# Altium PCB PCB1.PcbDoc (part 2 of 12)
Units mm, origin at the board's own origin, x right, y up, seen from the top; angles counter-clockwise.
Board outline 122.17 x 121.67 mm, 2 copper layers (Top Layer, Bottom Layer); 274 components, 225 nets, 941 pads, 421 vias.
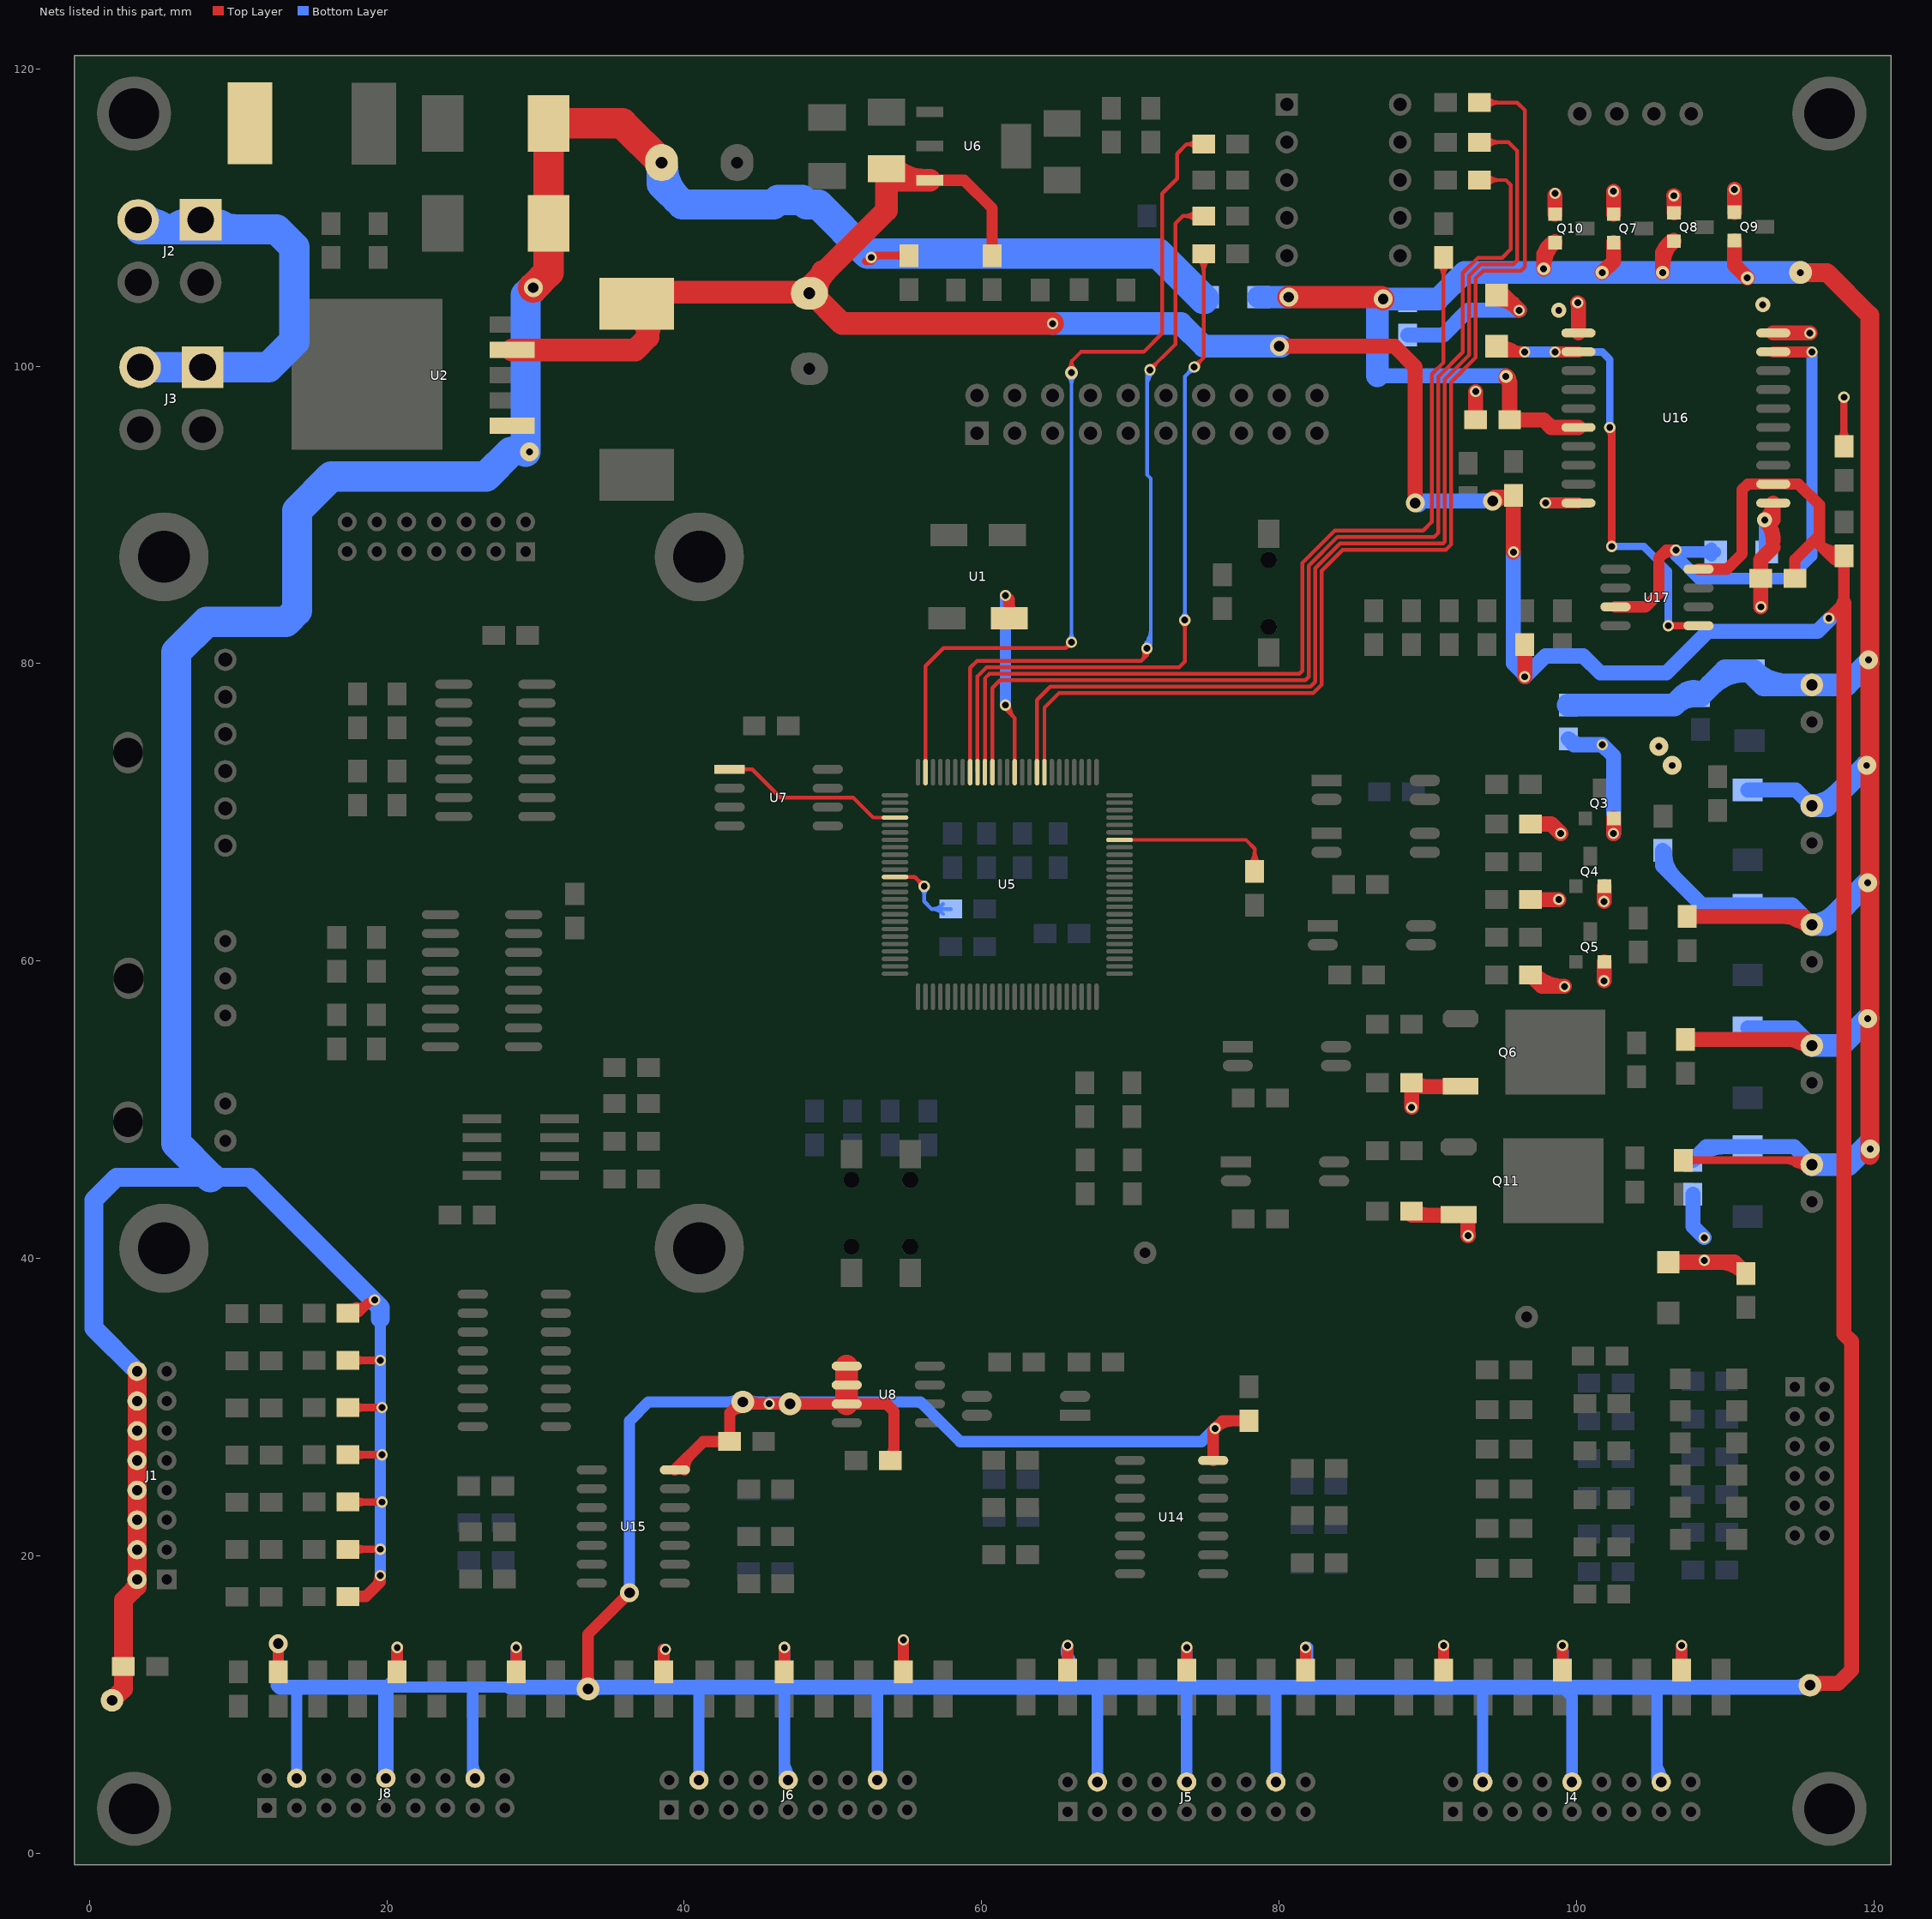
[diagram p2: the nets of this part, all layers, seen from the top]

## Via types
v1: diameter 0.762, hole 0.457, Top Layer to Bottom Layer, 339 vias
v2: diameter 1.27, hole 0.457, Top Layer to Bottom Layer, 39 vias
v3: diameter 0.889, hole 0.457, Top Layer to Bottom Layer, 21 vias
v4: diameter 1.27, hole 0.711, Top Layer to Bottom Layer, 12 vias
v5: diameter 1.524, hole 0.711, Top Layer to Bottom Layer, 5 vias
v6: diameter 1.016, hole 0.457, Top Layer to Bottom Layer, 3 vias
v7: diameter 0.711, hole 0.457, Top Layer to Bottom Layer, 1 vias
v8: diameter 1.524, hole 0.457, Top Layer to Bottom Layer, 1 vias

## Nets (pads, with @x,y where several pads share a name; then routed paths per layer and width w, separated by ;. In a path a pad name is that pad's centre, name@x,y a point inside that pad or via, vN(x,y) a via of type N, cw(c..) or ccw(c..) an arc to the next point about the centre after c; other vN are vias at no path point) (continued)
+5V: C16.1 C19.1 C62.1 C63.1 C65.1 J4.4 J4.10 J4.16 J5.4 J5.10 J5.16 J6.4 J6.10 J6.16 J8.4 J8.10 J8.16 L1.2 pad.0@115.697,11.303 R12.1 R14.1 R26.1 R28.1 R30.1 R32.1 R34.1 R36.1 R38.1 R40.1 R42.1 R44.1 R46.1 R48.1 R104.1 R105.1 R113.1 U2.4 U6.3 U8.1 U8.2 U8.3 U14.14 U15.14 U16.12 U17.8 | length 676.1
  Top Layer w0.762: R44.1@12.7,12.192 v4@12.7,14.351 ; R46.1@20.701,12.192 v1(20.701,13.843) ; R48.1@28.702,12.192 v1(28.702,13.843) ; v5(33.528,11.049) 33.528,14.732 v4@36.068,17.272 ; R26.1@38.608,12.192 v1@38.608,13.716 ; U15.14@39.37,25.781 41.275,27.686 C63.1@43.053,27.686 43.053,29.591 43.688,30.226 v1(45.72,30.226) U8.3@50.927,30.226 53.594,30.226 54.102,29.718 R12.1@54.102,26.543 ; R28.1@46.736,12.192 v1(46.736,13.843) ; R30.1@54.737,12.192 v1(54.737,14.351) ; U6.3@56.515,112.508 58.815,112.508 60.706,110.617 R14.1@60.706,107.442 ; R32.1@65.786,12.319 v1(65.786,13.97) ; R34.1@73.787,12.319 v1(73.787,13.843) ; U14.14@75.565,26.416 75.565,28.448 v1(75.692,28.575) ; C62.1@77.978,29.083 76.2,29.083 v1(75.692,28.575) ; R36.1@81.788,12.319 v1(81.788,13.843) ; R38.1@91.059,12.319 v1(91.059,13.97) ; R40.1@99.06,12.319 v1(99.06,13.97) ; R42.1@107.061,12.319 v1(107.061,13.97) ; U17.8@108.204,86.36 110.109,86.36 111.125,87.376 111.125,91.694 111.506,92.075 U16.12@113.23,92.075 114.935,92.075 116.332,90.678 116.332,88.646 ; C65.1@114.681,85.725 114.681,86.995 116.332,88.646 ; 116.769,87.578 cw(c116.822,86.128) R105.1@117.81,87.19 ; v1(116.967,83.058) 117.983,84.074 R105.1@117.983,87.249 117.094,87.249 116.332,88.011 ; v5@33.259,11.318 ccw(c32.608,11.969) 33.528,11.969 ; v5@33.259,11.318 ccw(c32.608,11.969) 33.528,11.969 ; v5@33.259,11.318 ccw(c32.608,11.969) 33.528,11.969 ; 33.528,11.969 ccw(c34.448,11.969) v5@33.797,11.318 ; 33.528,11.969 ccw(c34.448,11.969) v5@33.797,11.318 ; 33.528,11.969 ccw(c34.448,11.969) v5@33.797,11.318 ; U15.14@40.005,25.781 cw(c41.538,25.781) 40.454,26.865 ; U15.14@40.005,25.781 cw(c41.538,25.781) 40.454,26.865 ; U15.14@40.005,25.781 cw(c41.538,25.781) 40.454,26.865 ; U15.14@40.005,25.781 cw(c41.538,25.781) 40.454,26.865 ; 43.075,29.613 cw(c43.942,28.746) v5@43.942,29.972 ; 43.075,29.613 cw(c43.942,28.746) v5@43.942,29.972 ; 43.075,29.613 cw(c43.942,28.746) v5@43.942,29.972 ; v5@44.211,30.622 ccw(c45.168,31.579) 45.168,30.226 ; v5@44.211,30.622 ccw(c45.168,31.579) 45.168,30.226 ; v5@44.211,30.622 ccw(c45.168,31.579) 45.168,30.226 ; 46.197,30.226 cw(c46.197,29.306) v5@46.848,29.957 ; 46.197,30.226 ccw(c46.197,31.146) v5@46.848,30.495 ; 46.197,30.226 cw(c46.197,29.306) v5@46.848,29.957 ; 46.197,30.226 ccw(c46.197,31.146) v5@46.848,30.495 ; 46.197,30.226 cw(c46.197,29.306) v5@46.848,29.957 ; 46.197,30.226 ccw(c46.197,31.146) v5@46.848,30.495 ; v5@47.386,29.957 cw(c48.037,29.306) 48.037,30.226 ; v5@47.386,29.957 cw(c48.037,29.306) 48.037,30.226 ; v5@47.386,29.957 cw(c48.037,29.306) 48.037,30.226 ; v5@47.386,30.495 ccw(c48.037,31.146) 48.037,30.226 ; v5@47.386,30.495 ccw(c48.037,31.146) 48.037,30.226 ; v5@47.386,30.495 ccw(c48.037,31.146) 48.037,30.226 ; R12.1@53.795,26.596 ccw(c53.055,27.336) 54.102,27.336 ; R12.1@53.795,26.596 ccw(c53.055,27.336) 54.102,27.336 ; R12.1@53.795,26.596 ccw(c53.055,27.336) 54.102,27.336 ; v1(75.692,28.575) cw(c76.918,27.349) 76.918,29.083 ; v1(75.692,28.575) cw(c76.918,27.349) 76.918,29.083 ; v1(75.692,28.575) cw(c76.918,27.349) 76.918,29.083 ; 116.332,88.011 ccw(c117.446,89.125) 117.908,87.619 cw(c117.446,89.125) 116.332,88.011 ; 116.332,88.011 116.332,88.646 ; 117.228,87.115 ccw(c117.867,87.754) 118.132,86.89 cw(c117.867,87.754) 117.228,87.115
  Top Layer w1.016: v4(80.01,101.346) 87.757,101.346 89.154,99.949 v4(89.154,90.805) ; v4@94.488,91.186 95.631,91.186 R104.1@95.758,91.313 v1(95.758,87.503) ; v1(96.52,79.121) R113.1@96.52,81.28 ; pad.0@115.57,11.43 117.602,11.43 118.491,12.319 118.491,34.417 117.983,34.925 117.983,84.074 ; v4@94.451,90.842 cw(c95.281,90.012) 95.281,91.186 ccw(c95.281,90.012) v4@94.451,90.842 ; pad.0@115.877,11.123 cw(c116.617,10.383) 116.617,11.43 ccw(c116.617,10.383) pad.0@115.877,11.123
  Top Layer w1.27: L1.2@37.561,102.87 L1.2@37.561,104.206
  Top Layer w1.524: U2.4@28.433,101.1 36.711,101.1 37.561,101.95 ; L1.2@36.891,103.48 cw(c35.48,101.95) 37.561,101.95 ; L1.2@37.561,102.87 37.561,101.95 ; L1.2@37.561,104.206 38.333,104.978 C16.1@48.082,104.978 ; L1.2@38.231,103.48 ccw(c39.642,101.95) 37.561,101.95 ; C16.1@48.393,105.197 ccw(c47.427,106.869) 49.292,106.369 ; U8.3@50.927,30.226 U8.2@50.927,31.496 U8.1@50.927,32.766 ; C19.1@54.042,113.382 ccw(c56.15,115.49) U6.3@56.15,112.508 ; U6.3@56.515,112.508 54.37,112.508 C19.1@53.594,113.284 53.594,110.49 C16.1@48.082,104.978 ; v1(64.77,102.87) 50.622,102.87 48.514,104.978 C16.1@48.082,104.978 ; 37.561,101.95 cw(c39.668,101.95) 38.225,103.486 ccw(c39.668,101.95) 37.561,101.95 ; 37.561,101.95 ccw(c35.504,101.95) 36.885,103.474 cw(c35.504,101.95) 37.561,101.95 ; C16.1@48.752,104.978 cw(c50.37,104.978) 49.226,106.122 ccw(c50.37,104.978) C16.1@48.752,104.978 ; C16.1@48.9,104.904 cw(c51.051,104.904) 49.53,106.426 ccw(c51.051,104.904) C16.1@48.9,104.904
  Bottom Layer w0.762: 12.7,11.303 v4@12.7,14.351 ; J8.4@13.938,5.048 13.938,11.017 14.097,11.176 ; v1(20.701,13.843) 20.701,11.94 19.937,11.176 25.781,11.176 ; J8.16@25.938,5.048 25.781,5.205 25.781,11.176 ; v1(28.702,13.843) 28.702,11.557 28.321,11.176 25.781,11.176 ; 32.302,11.176 cw(c32.302,9.823) v5@33.259,10.78 ; v5@33.401,11.176 v5(33.528,11.049) ; v5@33.797,10.78 cw(c34.754,9.823) 34.754,11.176 ; v4(36.322,17.526) 36.322,29.083 37.592,30.353 45.339,30.353 ; 38.608,11.176 v1@38.608,13.716 ; 40.767,11.176 40.989,10.954 J6.4@40.989,4.921 ; v1@45.72,30.353 55.88,30.353 58.547,27.686 74.803,27.686 v1(75.692,28.575) ; v1@46.736,13.716 46.736,11.176 46.736,5.174 J6.10@46.989,4.921 ; 52.959,11.176 52.959,10.795 52.989,10.765 J6.16@52.989,4.921 ; 54.737,11.176 v1(54.737,14.351) ; 65.913,11.176 65.913,13.081 ; 67.437,11.176 67.786,10.827 J5.4@67.786,4.794 ; J5.10@73.786,4.794 73.786,10.923 73.533,11.176 73.914,11.557 73.787,11.684 v1(73.787,13.843) ; 79.756,11.176 79.786,11.146 J5.16@79.786,4.794 ; 81.915,11.176 v1@81.915,13.843 ; v1(91.059,13.97) 91.059,11.43 91.313,11.176 ; J4.4@93.694,4.794 93.694,11.144 99.092,11.144 ; v1@99.06,13.843 99.06,13.589 99.092,13.557 99.092,11.176 ; J4.10@99.694,4.794 99.694,10.542 99.092,11.144 ; J4.16@105.694,4.794 105.41,5.078 105.41,11.144 99.092,11.144 ; 106.966,11.176 107.061,11.271 v1(107.061,13.97) ; 25.781,6.076 ccw(c26.966,6.076) J8.16@26.128,5.238 ; 25.781,6.076 ccw(c26.966,6.076) J8.16@26.128,5.238 ; 25.781,6.076 ccw(c26.966,6.076) J8.16@26.128,5.238 ; 43.022,30.353 cw(c43.022,29.433) v5@43.673,30.084 ; 43.022,30.353 ccw(c43.022,31.273) v5@43.673,30.622 ; 43.022,30.353 cw(c43.022,29.433) v5@43.673,30.084 ; 43.022,30.353 ccw(c43.022,31.273) v5@43.673,30.622 ; 43.022,30.353 cw(c43.022,29.433) v5@43.673,30.084 ; 43.022,30.353 ccw(c43.022,31.273) v5@43.673,30.622 ; v5@44.211,30.084 cw(c44.862,29.433) 44.862,30.353 ; v5@44.211,30.084 cw(c44.862,29.433) 44.862,30.353 ; v5@44.211,30.084 cw(c44.862,29.433) 44.862,30.353 ; v5@44.211,30.622 ccw(c44.862,31.273) 44.862,30.353 ; v5@44.211,30.622 ccw(c44.862,31.273) 44.862,30.353 ; v5@44.211,30.622 ccw(c44.862,31.273) 44.862,30.353 ; v1(45.72,30.226) cw(c46.005,29.733) 46.152,30.283 ; v1(45.72,30.226) cw(c46.005,29.733) 46.152,30.283 ; v1(45.72,30.226) cw(c46.005,29.733) 46.152,30.283 ; v1@45.891,30.353 cw(c45.891,29) v5@46.848,29.957 ; v1@45.891,30.353 cw(c45.891,29) v5@46.848,29.957 ; v1@45.891,30.353 cw(c45.891,29) v5@46.848,29.957 ; 46.736,6.181 ccw(c48.249,6.181) J6.10@47.179,5.111 ; 46.736,6.181 ccw(c48.249,6.181) J6.10@47.179,5.111 ; 46.736,6.181 ccw(c48.249,6.181) J6.10@47.179,5.111 ; J6.10@46.795,5.108 ccw(c46.462,5.428) 46.863,5.66 ; J6.10@46.795,5.108 ccw(c46.462,5.428) 46.863,5.66 ; J6.10@46.795,5.108 ccw(c46.462,5.428) 46.863,5.66 ; v5@47.386,29.957 cw(c48.343,29) 48.343,30.353 ; v5@47.386,29.957 cw(c48.343,29) 48.343,30.353 ; v5@47.386,29.957 cw(c48.343,29) 48.343,30.353 ; v1(65.786,13.97) ccw(c66.442,13.61) 65.913,13.081 ; v1(65.786,13.97) ccw(c66.442,13.61) 65.913,13.081 ; v1(65.786,13.97) 65.786,13.208 65.913,13.081 ; 105.41,6.129 ccw(c107.029,6.129) J4.16@105.884,4.984 ; 105.41,6.129 ccw(c107.029,6.129) J4.16@105.884,4.984 ; 105.41,6.129 ccw(c107.029,6.129) J4.16@105.884,4.984 ; J4.16@105.487,4.966 ccw(c105.074,5.311) 105.54,5.58 ; J4.16@105.487,4.966 ccw(c105.074,5.311) 105.54,5.58 ; J4.16@105.487,4.966 ccw(c105.074,5.311) 105.54,5.58
  Bottom Layer w1.016: 12.7,11.303 12.827,11.176 14.097,11.176 19.937,11.176 19.938,11.175 J8.10@19.938,5.048 ; 28.321,11.176 v5@33.401,11.176 ; v5@33.528,11.176 40.767,11.176 46.736,11.176 52.959,11.176 54.737,11.176 65.913,11.176 67.437,11.176 73.533,11.176 79.756,11.176 81.915,11.176 91.313,11.176 99.092,11.176 106.966,11.176 115.316,11.176 pad.0@115.57,11.43 ; v4@89.408,90.678 89.662,90.932 v4(94.361,90.932) ; v1(95.758,87.503) 95.758,80.01 v1@96.52,79.248 ; v1(96.52,79.121) 97.917,80.518 100.457,80.518 101.6,79.375 106.045,79.375 108.839,82.169 116.205,82.169 v1@117.03,82.995 ; 32.608,11.176 cw(c32.608,10.129) 33.348,10.869 ccw(c32.608,10.129) 32.608,11.176 ; v5@33.708,10.869 cw(c34.448,10.129) 34.448,11.176 ccw(c34.448,10.129) v5@33.708,10.869 ; 114.777,11.176 ccw(c114.777,12.223) 115.517,11.483 cw(c114.777,12.223) 114.777,11.176
  Bottom Layer w1.524: v1(64.77,102.87) 73.406,102.87 74.93,101.346 v4@80.137,101.346
  other v1: 38.735,13.716
  other v4: 12.7,14.097
  other v5: 47.117,30.226 43.942,30.353
+24V: C4.1 C8.1 C17.1 D11.2 D13.2 J1.2 J1.4 J1.6 J1.8 J1.10 J1.12 J1.14 J1.16 pad.1@1.524,10.287 R16.1 R49.2 R50.2 R51.2 R52.2 R53.2 R54.2 R55.2 R115.2 U2.1 | length 280.2
  Top Layer w0.508: R50.2@17.399,20.447 v1(19.558,20.447) ; R51.2@17.399,23.622 v1(19.685,23.622) ; R52.2@17.399,26.797 v1(19.685,26.797) ; R53.2@17.399,29.972 v1(19.685,29.972) ; R54.2@17.399,33.147 v1(19.558,33.147) ; R55.2@17.416,36.385 cw(c18.239,35.911) R55.2@17.993,36.828 ; R55.2@17.52,36.195 ccw(c17.57,37.313) 18.361,36.522 ; R55.2@17.543,36.703 ccw(c17.638,38.877) v1@19.177,37.338 ; 18.161,36.322 v1@19.177,37.338 ; 18.627,37.02 cw(c18.968,36.43) v1@19.144,37.088 ; 18.743,36.904 cw(c19.177,36.471) v1@19.177,37.084 ; v1(19.177,37.211) v1@19.177,37.338 ; 52.197,107.061 52.578,107.061 52.959,107.442 ; R16.1@55.118,107.442 52.959,107.442 ; R50.2@17.795,20.178 cw(c18.446,19.527) 18.446,20.447 ; R50.2@17.795,20.178 cw(c18.446,19.527) 18.446,20.447 ; R50.2@17.795,20.178 cw(c18.446,19.527) 18.446,20.447 ; R50.2@17.795,20.716 ccw(c18.446,21.367) 18.446,20.447 ; R50.2@17.795,20.716 ccw(c18.446,21.367) 18.446,20.447 ; R50.2@17.795,20.716 ccw(c18.446,21.367) 18.446,20.447 ; R51.2@17.795,23.353 cw(c18.446,22.702) 18.446,23.622 ; R51.2@17.795,23.353 cw(c18.446,22.702) 18.446,23.622 ; R51.2@17.795,23.353 cw(c18.446,22.702) 18.446,23.622 ; R51.2@17.795,23.891 ccw(c18.446,24.542) 18.446,23.622 ; R51.2@17.795,23.891 ccw(c18.446,24.542) 18.446,23.622 ; R51.2@17.795,23.891 ccw(c18.446,24.542) 18.446,23.622 ; R52.2@17.795,26.528 cw(c18.446,25.877) 18.446,26.797 ; R52.2@17.795,26.528 cw(c18.446,25.877) 18.446,26.797 ; R52.2@17.795,26.528 cw(c18.446,25.877) 18.446,26.797 ; R52.2@17.795,27.066 ccw(c18.446,27.717) 18.446,26.797 ; R52.2@17.795,27.066 ccw(c18.446,27.717) 18.446,26.797 ; R52.2@17.795,27.066 ccw(c18.446,27.717) 18.446,26.797 ; R53.2@17.795,29.703 cw(c18.446,29.052) 18.446,29.972 ; R53.2@17.795,29.703 cw(c18.446,29.052) 18.446,29.972 ; R53.2@17.795,29.703 cw(c18.446,29.052) 18.446,29.972 ; R53.2@17.795,30.241 ccw(c18.446,30.892) 18.446,29.972 ; R53.2@17.795,30.241 ccw(c18.446,30.892) 18.446,29.972 ; R53.2@17.795,30.241 ccw(c18.446,30.892) 18.446,29.972 ; R54.2@17.795,32.878 cw(c18.446,32.227) 18.446,33.147 ; R54.2@17.795,32.878 cw(c18.446,32.227) 18.446,33.147 ; R54.2@17.795,32.878 cw(c18.446,32.227) 18.446,33.147 ; R54.2@17.795,33.416 ccw(c18.446,34.067) 18.446,33.147 ; R54.2@17.795,33.416 ccw(c18.446,34.067) 18.446,33.147 ; R54.2@17.795,33.416 ccw(c18.446,34.067) 18.446,33.147 ; 52.959,107.442 ccw(c52.959,107.156) 52.695,107.266 cw(c52.959,107.156) 52.959,107.442 ; 54.198,107.442 cw(c54.198,106.522) 54.849,107.173 ccw(c54.198,106.522) 54.198,107.442 ; 54.198,107.442 ccw(c54.198,108.362) 54.849,107.711 cw(c54.198,108.362) 54.198,107.442 ; v1@52.668,107.225 cw(c53.191,106.702) 53.191,107.442 ccw(c53.191,106.702) v1@52.668,107.225
  Top Layer w0.762: R49.2@17.78,17.272 18.593,17.272 19.558,18.237 v1(19.558,18.669) ; 19.253,17.932 ccw(c18.516,18.669) v1(19.558,18.669) ; 19.253,17.932 ccw(c18.516,18.669) v1(19.558,18.669) ; 19.253,17.932 ccw(c18.516,18.669) v1(19.558,18.669)
  Top Layer w1.27: pad.1@1.651,10.414 2.286,11.049 2.286,12.954 2.286,17.018 3.207,17.939 J1.2@3.207,18.415 J1.4@3.207,20.415 J1.6@3.207,22.415 J1.8@3.207,24.415 J1.10@3.207,26.415 J1.12@3.207,28.415 J1.14@3.207,30.415 J1.16@3.207,32.415 ; 2.845,17.577 ccw(c2.007,18.415) J1.2@3.192,18.415 ; 2.845,17.577 ccw(c2.007,18.415) J1.2@3.192,18.415 ; 2.845,17.577 ccw(c2.007,18.415) J1.2@3.192,18.415
  Top Layer w2.032: v4(29.845,105.283) 30.873,106.311 D13.2@30.873,109.605 D11.2@30.873,116.336 35.833,116.336 C17.1@38.479,113.69
  Bottom Layer w0.762: v1(19.558,18.669) v1(19.558,20.447) v1(19.558,33.147) 19.558,35.941
  Bottom Layer w1.27: J1.16@3.207,32.415 0.305,35.317 0.305,43.942 1.829,45.466 8.128,45.466 10.795,45.466 19.558,36.703 19.558,35.941
  Bottom Layer w2.032: 8.128,45.466 5.842,47.752 5.842,80.772 7.874,82.804 13.208,82.804 13.97,83.566 13.97,90.297 16.256,92.583 26.67,92.583 28.321,94.234 ; v2@29.337,94.234 29.337,104.775 v4(29.845,105.283) ; C17.1@38.481,113.69 38.481,112.268 39.878,110.871 46.002,110.871 46.307,111.176 47.927,111.176 48.232,110.871 49.022,110.871 52.324,107.569 71.882,107.569 R115.2@74.93,104.521 ; C17.1@38.563,113.54 ccw(c41.829,113.54) 39.519,111.23 ; C17.1@38.563,113.54 ccw(c41.829,113.54) 39.519,111.23 ; C17.1@38.563,113.54 ccw(c41.829,113.54) 39.519,111.23
  other v1: 52.578,107.315
  other v2: 29.591,94.234
+24VA: C10.1 C13.1 C15.1 C67.1 D39.K D40.K D41.K D42.K D43.K J14.1 J15.1 J16.1 J17.1 J19.1 Q7.2 Q8.2 Q9.2 Q10.2 R85.1 R86.1 R102.1 R103.1 R114.1 R115.1 U16.6 | length 342.1
  Top Layer w0.508: R114.1@107.188,46.609 115.53,46.609 J19.1@115.824,46.315 ; R114.1@107.457,46.34 cw(c108.108,45.689) 108.108,46.609 ; R114.1@107.457,46.34 cw(c108.108,45.689) 108.108,46.609 ; R114.1@107.457,46.34 cw(c108.108,45.689) 108.108,46.609 ; R114.1@107.457,46.34 cw(c108.108,45.689) 108.108,46.609 ; R114.1@107.457,46.878 ccw(c108.108,47.529) 108.108,46.609 ; R114.1@107.457,46.878 ccw(c108.108,47.529) 108.108,46.609 ; R114.1@107.457,46.878 ccw(c108.108,47.529) 108.108,46.609 ; R114.1@107.457,46.878 ccw(c108.108,47.529) 108.108,46.609 ; 113.888,46.609 cw(c113.888,44.379) J19.1@115.465,45.956 ; 113.888,46.609 cw(c113.888,44.379) J19.1@115.465,45.956 ; 113.888,46.609 cw(c113.888,44.379) J19.1@115.465,45.956 ; 113.888,46.609 cw(c113.888,44.379) J19.1@115.465,45.956 ; 114.71,46.391 ccw(c114.958,46.82) J19.1@115.385,46.571 ; 114.71,46.391 ccw(c114.958,46.82) J19.1@115.385,46.571 ; 114.71,46.391 ccw(c114.958,46.82) J19.1@115.385,46.571 ; 114.71,46.391 ccw(c114.958,46.82) J19.1@115.385,46.571 ; 114.71,46.391 ccw(c114.958,46.82) J19.1@115.385,46.571 ; 114.71,46.391 ccw(c114.958,46.82) J19.1@115.385,46.571 ; 115.114,46.609 cw(c115.114,45.605) J19.1@115.824,46.315 ; 115.114,46.609 cw(c115.114,45.605) J19.1@115.824,46.315 ; 115.114,46.609 cw(c115.114,45.605) J19.1@115.824,46.315 ; 115.114,46.609 cw(c115.114,45.605) J19.1@115.824,46.315
  Top Layer w1.016: v3(95.25,99.314) 95.25,99.187 95.504,98.933 C67.1@95.504,96.393 97.79,96.393 98.298,95.885 U16.6@100.13,95.885 ; v3(97.79,106.553) 97.79,107.553 Q10.2@98.556,108.319 ; v3(101.727,106.299) 102.493,107.065 Q7.2@102.493,108.319 ; v3(105.791,106.299) 105.791,107.645 Q8.2@106.553,108.407 ; R103.1@107.315,54.737 115.403,54.737 J17.1@115.824,54.316 ; R102.1@107.442,62.992 115.276,62.992 J16.1@115.824,62.444 ; Q9.2@110.621,108.446 110.621,106.803 v3(111.487,105.937) ; 114.657,62.834 ccw(c115.383,64.091) J16.1@115.758,62.689 ; 114.848,54.596 ccw(c115.332,55.435) J17.1@115.722,54.549 ; v3@95.295,99.359 cw(c94.79,98.854) 95.504,98.854 ; v3@95.295,99.359 cw(c94.795,98.856) 95.504,98.856 ; v3@95.295,99.359 cw(c94.79,98.854) 95.504,98.854 ; v3@95.295,99.359 cw(c94.795,98.856) 95.504,98.856 ; v3@95.295,99.359 cw(c94.79,98.854) 95.504,98.854 ; v3@95.295,99.359 cw(c94.795,98.856) 95.504,98.856 ; v3@95.295,99.359 cw(c94.79,98.854) 95.504,98.854 ; v3@95.295,99.359 cw(c94.795,98.856) 95.504,98.856 ; v3@97.79,106.593 cw(c100.281,106.593) Q10.2@98.52,108.355 ; v3@97.79,106.593 cw(c100.281,106.593) Q10.2@98.52,108.355 ; v3@97.79,106.593 cw(c100.281,106.593) Q10.2@98.52,108.355 ; v3@97.79,106.593 cw(c100.281,106.593) Q10.2@98.52,108.355 ; 97.79,107.236 cw(c99.018,107.236) Q10.2@98.536,108.366 ; 97.79,107.236 cw(c99.018,107.236) Q10.2@98.536,108.366 ; 97.79,107.236 cw(c99.018,107.236) Q10.2@98.536,108.366 ; 97.79,107.236 cw(c99.018,107.236) Q10.2@98.536,108.366 ; v3@105.791,106.69 cw(c108.27,106.69) Q8.2@106.517,108.443 ; v3@105.791,106.69 cw(c108.27,106.69) Q8.2@106.517,108.443 ; v3@105.791,106.69 cw(c108.27,106.69) Q8.2@106.517,108.443 ; v3@105.791,106.69 cw(c108.27,106.69) Q8.2@106.517,108.443 ; 105.791,107.33 cw(c107.014,107.33) Q8.2@106.533,108.454 ; 105.791,107.33 cw(c107.014,107.33) Q8.2@106.533,108.454 ; 105.791,107.33 cw(c107.014,107.33) Q8.2@106.533,108.454 ; 105.791,107.33 cw(c107.014,107.33) Q8.2@106.533,108.454 ; 113.888,62.992 cw(c113.888,60.508) 115.644,62.264 ccw(c113.888,60.508) 113.888,62.992 ; 114.194,54.737 cw(c114.194,52.686) 115.644,54.136 ccw(c114.194,52.686) 114.194,54.737
  Top Layer w1.27: v8(115.062,106.299) 116.84,106.299 119.71,103.429 v2@119.71,46.939
  Top Layer w1.524: v4(80.645,104.648) 86.868,104.648 v4(86.995,104.521)
  Bottom Layer w1.016: 86.614,99.365 95.199,99.365 v3(95.25,99.314) ; R86.1@105.791,67.437 105.791,66.421 108.446,63.766 D41.K@111.51,63.766 114.502,63.766 J16.1@115.824,62.444 ; C13.1@107.823,46.609 108.724,47.51 D43.K@111.51,47.51 114.629,47.51 J19.1@115.824,46.315 ; D42.K@111.51,55.511 114.629,55.511 J17.1@115.824,54.316 ; D40.K@111.51,71.513 114.756,71.513 J15.1@115.824,70.445 ; R86.1@105.918,67.31 ccw(c108.371,67.31) 106.636,65.576 ; R86.1@105.918,67.31 ccw(c108.371,67.31) 106.636,65.576 ; R86.1@105.918,67.31 ccw(c108.371,67.31) 106.636,65.576 ; R86.1@105.918,67.31 ccw(c108.371,67.31) 106.636,65.576 ; C13.1@107.913,46.646 cw(c109.999,44.56) 109.999,47.51 ; C13.1@107.913,46.646 cw(c109.999,44.56) 109.999,47.51 ; C13.1@107.913,46.646 cw(c109.999,44.56) 109.999,47.51 ; C13.1@107.913,46.646 cw(c109.999,44.56) 109.999,47.51
  Bottom Layer w1.524: R115.1@78.613,104.648 v4(80.645,104.648) ; 86.614,99.365 86.614,104.14 v4(86.995,104.521) 90.678,104.521 92.456,106.299 v3(101.727,106.299) v3(105.791,106.299) v8(115.062,106.299) ; C15.1@99.441,77.216 106.553,77.216 ; J19.1@115.824,46.315 118.273,46.315 v2@119.583,47.625 ; J17.1@115.824,54.316 117.765,54.316 v2(119.583,56.134) ; v2(119.507,73.152) 116.8,70.445 J15.1@115.824,70.445 ; v2(119.583,65.278) 116.749,62.444 J16.1@115.824,62.444 ; v2@119.583,80.01 118.146,78.573 J14.1@115.824,78.573 112.578,78.573 D39.K@111.637,79.514 109.994,79.514 R85.1@108.331,77.851 107.188,77.851 ; 86.614,103.908 cw(c87.608,103.908) v4@86.905,104.611 ; 86.614,103.908 cw(c87.608,103.908) v4@86.905,104.611 ; 86.614,103.908 cw(c87.608,103.908) v4@86.905,104.611 ; 106.553,77.216 cw(c108.113,75.656) R85.1@108.344,77.85 ; 106.553,77.216 cw(c108.113,75.656) R85.1@108.344,77.85 ; 106.553,77.216 cw(c108.113,75.656) R85.1@108.344,77.85 ; 106.553,77.216 107.188,77.851 ; 107.188,77.851 cw(c107.858,77.181) R85.1@108.404,77.955 ; 107.188,77.851 cw(c107.858,77.181) R85.1@108.404,77.955 ; 107.188,77.851 cw(c107.858,77.181) R85.1@108.404,77.955 ; 109.012,78.532 cw(c111.383,76.162) D39.K@111.383,79.514 ; 109.012,78.532 cw(c111.383,76.162) D39.K@111.383,79.514 ; 109.012,78.532 cw(c111.383,76.162) D39.K@111.383,79.514 ; D39.K@111.891,79.514 ccw(c114.163,81.786) 114.163,78.573 ; D39.K@111.891,79.514 ccw(c114.163,81.786) 114.163,78.573 ; D39.K@111.891,79.514 ccw(c114.163,81.786) 114.163,78.573 ; J16.1@115.824,62.444 ccw(c115.824,64.678) 117.403,63.098 cw(c115.824,64.678) J16.1@115.824,62.444 ; J15.1@115.824,70.445 ccw(c115.824,72.801) 117.49,71.135 cw(c115.824,72.801) J15.1@115.824,70.445
  other v2: 119.761,47.371 119.634,80.264
+24VIN: F1.1 J2.1 J2.3 J3.1 J3.3 | length 47
  Bottom Layer w2.032: J3.3@3.411,99.938 J3.1@7.611,99.938 12.054,99.938 13.779,101.663 13.779,108.013 12.584,109.209 7.611,109.209 J2.3@3.411,109.209 ; J2.3@3.439,109.493 cw(c4.028,108.158) 4.758,109.422 ; 6.011,109.422 cw(c6.74,108.158) J2.1@7.329,109.493 ; J2.1@7.639,109.493 cw(c8.228,108.158) 8.958,109.422 ; J2.3@3.556,110.116 ccw(c5.744,112.304) 5.744,109.209 cw(c5.744,112.304) J2.3@3.556,110.116 ; 5.024,109.209 ccw(c5.024,112.304) 7.212,110.116 cw(c5.024,112.304) 5.024,109.209 ; J2.1@7.756,110.116 ccw(c9.944,112.304) 9.944,109.209 cw(c9.944,112.304) J2.1@7.756,110.116
A: R91.1 U5.8 | length 84.4
  Top Layer w0.254: U5.8@64.222,72.701 64.222,77.049 65.202,78.029 82.296,78.029 82.855,78.588 82.855,86.235 84.275,87.655 91.211,87.655 91.567,88.011 91.567,98.933 93.218,100.584 93.218,105.918 93.726,106.426 96.266,106.426 96.52,106.68 96.52,117.221 96.012,117.729 R91.1@93.472,117.729 ; R91.1@93.958,117.37 cw(c94.825,116.503) 94.825,117.729 ; R91.1@93.958,117.37 cw(c94.825,116.503) 94.825,117.729 ; R91.1@93.958,117.37 cw(c94.825,116.503) 94.825,117.729 ; R91.1@93.958,117.37 cw(c94.825,116.503) 94.825,117.729 ; R91.1@93.958,118.088 ccw(c94.825,118.955) 94.825,117.729 ; R91.1@93.958,118.088 ccw(c94.825,118.955) 94.825,117.729 ; R91.1@93.958,118.088 ccw(c94.825,118.955) 94.825,117.729 ; R91.1@93.958,118.088 ccw(c94.825,118.955) 94.825,117.729
AGND: C10.2 C13.2 C15.2 C64.2 C65.2 C67.2 C69.2 Q3.2 Q4.2 Q5.2 Q6.3 Q7.1 Q8.1 Q9.1 Q10.1 Q11.3 R79.2 R80.2 R95.2 R96.2 R106.1 R107.2 R108.2 R110.2 U16.1 U16.10 U16.11 U16.20 | length 125.8
  Top Layer w0.508: R110.2@88.646,43.18 R110.2@88.914,42.912 ; C64.2@117.983,94.615 v1(117.983,97.917) ; C64.2@117.714,95.011 ccw(c117.063,95.662) 117.983,95.662 ; C64.2@117.714,95.011 ccw(c117.063,95.662) 117.983,95.662 ; C64.2@117.714,95.011 ccw(c117.063,95.662) 117.983,95.662 ; C64.2@117.714,95.011 ccw(c117.063,95.662) 117.983,95.662 ; 117.983,95.662 ccw(c118.903,95.662) C64.2@118.252,95.011 ; 117.983,95.662 ccw(c118.903,95.662) C64.2@118.252,95.011 ; 117.983,95.662 ccw(c118.903,95.662) C64.2@118.252,95.011 ; 117.983,95.662 ccw(c118.903,95.662) C64.2@118.252,95.011
  Top Layer w0.762: v1(97.917,90.805) U16.10@100.13,90.805
  Top Layer w1.016: R110.2@88.914,42.912 92.683,42.912 92.683,41.683 92.71,41.656 v1(92.71,41.529) ; v1(88.914,50.165) 88.914,51.548 Q6.3@92.683,51.548 ; C67.2@93.218,96.393 v1(93.218,98.298) ; R107.2@94.615,104.775 95.123,104.775 v1(96.139,103.759) ; R95.2@96.901,59.055 97.663,58.293 v1(99.187,58.293) ; R80.2@96.901,64.135 v1(98.806,64.135) ; R79.2@96.901,69.215 98.298,69.215 v1(98.933,68.58) ; v1@98.552,111.506 98.556,111.502 Q10.1@98.556,110.224 ; v1(100.076,104.267) 100.13,104.213 U16.1@100.13,102.235 ; v1(101.854,58.674) 101.866,58.686 Q5.2@101.866,59.948 ; v1(101.854,64.008) 101.866,64.02 Q4.2@101.866,65.028 ; v1(102.489,68.58) 102.501,68.592 Q3.2@102.501,69.6 ; v1(102.489,111.76) 102.493,111.756 Q7.1@102.493,110.224 ; R106.1@106.172,39.751 110.617,39.751 C69.2@111.379,38.989 ; v1(106.549,111.467) 106.553,111.464 Q8.1@106.553,110.312 ; v1(110.617,111.887) 110.621,111.883 Q9.1@110.621,110.351 ; v1(112.395,83.82) C65.2@112.395,85.725 112.395,86.995 113.23,87.83 ; 113.23,88.259 ccw(c111.246,88.259) v6(112.649,89.662) ; 113.23,89.662 U16.11@113.23,90.805 ; U16.20@113.23,102.235 v1(115.697,102.235) ; R110.2@89.117,43.27 ccw(c89.981,44.134) 89.981,42.912 ; R110.2@89.117,43.27 ccw(c89.981,44.134) 89.981,42.912 ; R110.2@89.117,43.27 ccw(c89.981,44.134) 89.981,42.912 ; R110.2@89.117,43.27 ccw(c89.981,44.134) 89.981,42.912 ; R96.2@89.117,51.906 ccw(c89.981,52.77) 89.981,51.548 ; R96.2@89.117,51.906 ccw(c89.981,52.77) 89.981,51.548 ; R96.2@89.117,51.906 ccw(c89.981,52.77) 89.981,51.548 ; R96.2@89.117,51.906 ccw(c89.981,52.77) 89.981,51.548 ; R107.2@94.615,104.521 cw(c94.615,102.681) v1@95.916,103.982 ; R107.2@94.615,104.521 cw(c94.615,102.681) v1@95.916,103.982 ; R107.2@94.615,104.521 cw(c94.615,102.681) v1@95.916,103.982 ; R107.2@94.615,104.521 cw(c94.615,102.681) v1@95.916,103.982 ; R107.2@94.835,104.902 ccw(c96.091,105.627) 95.716,104.226 ; R107.2@94.835,104.902 ccw(c96.091,105.627) 95.716,104.226 ; R107.2@94.835,104.902 ccw(c96.091,105.627) 95.716,104.226 ; R107.2@94.835,104.902 ccw(c96.091,105.627) 95.716,104.226 ; R107.2@94.835,104.902 ccw(c96.091,105.627) 95.716,104.226 ; R107.2@94.835,104.902 ccw(c96.091,105.627) 95.716,104.226 ; R95.2@97.118,59.145 ccw(c99.174,61.201) v1@99.174,58.293 ; R95.2@97.118,59.145 ccw(c99.174,61.201) v1@99.174,58.293 ; R95.2@97.118,59.145 ccw(c99.174,61.201) v1@99.174,58.293 ; R95.2@97.118,59.145 ccw(c99.174,61.201) v1@99.174,58.293 ; 109.539,39.751 cw(c109.539,37.276) C69.2@111.289,39.026 ; 109.539,39.751 cw(c109.539,37.276) C69.2@111.289,39.026 ; 109.539,39.751 cw(c109.539,37.276) C69.2@111.289,39.026 ; 109.539,39.751 cw(c109.539,37.276) C69.2@111.289,39.026 ; v6(112.649,89.662) ccw(c111.815,90.805) U16.11@113.23,90.805 ; v6(112.649,89.662) ccw(c111.815,90.805) U16.11@113.23,90.805 ; v6(112.649,89.662) ccw(c111.815,90.805) U16.11@113.23,90.805
  Bottom Layer w1.016: C10.2@88.646,102.108 91.059,102.108 92.71,103.759 v1(96.139,103.759) ; C15.2@99.441,74.93 99.822,74.549 v1(101.727,74.549) 102.489,73.787 v1(102.489,68.58) ; C13.2@107.823,44.323 107.823,42.164 v1(108.585,41.402) ; v6(112.649,89.662) 112.776,89.535 R108.2@112.776,87.503 ; C15.2@99.531,74.893 ccw(c100.361,75.723) 100.361,74.549 ; C15.2@99.531,74.893 ccw(c100.361,75.723) 100.361,74.549 ; C15.2@99.531,74.893 ccw(c100.361,75.723) 100.361,74.549 ; C15.2@99.531,74.893 ccw(c100.361,75.723) 100.361,74.549
  other v1: 108.585,39.878 98.552,111.633
  other v2: 106.426,73.152 105.537,74.422
  other v6: 98.806,103.759 112.522,104.14
B: R90.1 U5.9 | length 81.2
  Top Layer w0.254: U5.9@63.722,72.701 63.722,77.565 64.618,78.461 82.117,78.461 82.423,78.766 82.423,86.414 84.096,88.087 91.033,88.087 91.135,88.19 91.135,99.112 92.786,100.763 92.786,106.097 93.547,106.858 95.759,106.858 96.012,107.111 96.012,114.478 95.428,115.062 R90.1@93.472,115.062 ; R90.1@93.958,114.703 cw(c94.825,113.836) 94.825,115.062 ; R90.1@93.958,114.703 cw(c94.825,113.836) 94.825,115.062 ; R90.1@93.958,114.703 cw(c94.825,113.836) 94.825,115.062 ; R90.1@93.958,114.703 cw(c94.825,113.836) 94.825,115.062 ; R90.1@93.958,115.421 ccw(c94.825,116.288) 94.825,115.062 ; R90.1@93.958,115.421 ccw(c94.825,116.288) 94.825,115.062 ; R90.1@93.958,115.421 ccw(c94.825,116.288) 94.825,115.062 ; R90.1@93.958,115.421 ccw(c94.825,116.288) 94.825,115.062
BOOT0: R64.2 U5.94 | length 16.4
  Top Layer w0.254: U5.94@69.272,68.151 77.772,68.151 78.359,67.564 R64.2@78.359,66.294 ; R64.2@78,66.526 ccw(c77.133,67.393) 78.359,67.393 ; R64.2@78,66.526 ccw(c77.133,67.393) 78.359,67.393 ; R64.2@78,66.526 ccw(c77.133,67.393) 78.359,67.393 ; 78.359,67.393 ccw(c79.585,67.393) R64.2@78.718,66.526 ; 78.359,67.393 ccw(c79.585,67.393) R64.2@78.718,66.526 ; 78.359,67.393 ccw(c79.585,67.393) R64.2@78.718,66.526
BOOT1: R24.2 U5.37 | length 19.1
  Top Layer w0.254: U5.37@54.172,65.651 55.507,65.651 v1(56.134,65.024) ; 55.7,65.458 cw(c55.267,65.024) v1@55.88,65.024 ; 55.7,65.458 ccw(c56.134,65.891) v1@56.134,65.278 ; 55.7,65.458 cw(c55.267,65.024) v1@55.88,65.024 ; 55.7,65.458 ccw(c56.134,65.891) v1@56.134,65.278 ; 55.7,65.458 cw(c55.267,65.024) v1@55.88,65.024 ; 55.7,65.458 ccw(c56.134,65.891) v1@56.134,65.278 ; 55.794,65.344 ccw(c56.223,65.459) v1(56.134,65.024) ; 55.794,65.344 ccw(c56.223,65.459) v1(56.134,65.024) ; 55.794,65.344 ccw(c56.223,65.459) v1(56.134,65.024) ; 55.814,65.364 cw(c55.699,64.935) v1(56.134,65.024) ; 55.814,65.364 cw(c55.699,64.935) v1(56.134,65.024) ; 55.814,65.364 cw(c55.699,64.935) v1(56.134,65.024)
  Bottom Layer w0.254: v1(56.134,65.024) 56.134,64.008 56.642,63.5 ; R24.2@57.912,63.5 56.642,63.5 ; v1@55.954,64.844 cw(c55.521,64.411) 56.134,64.411 ; v1@55.954,64.844 cw(c55.521,64.411) 56.134,64.411 ; v1@55.954,64.844 cw(c55.521,64.411) 56.134,64.411 ; 56.134,64.411 cw(c56.747,64.411) v1@56.314,64.844 ; 56.134,64.411 cw(c56.747,64.411) v1@56.314,64.844 ; 56.134,64.411 cw(c56.747,64.411) v1@56.314,64.844 ; 56.642,63.5 cw(c56.642,62.468) R24.2@57.408,63.16 ; 56.642,63.5 ccw(c56.642,64.532) R24.2@57.408,63.84 ; 56.642,63.5 cw(c56.642,62.468) R24.2@57.408,63.16 ; 56.642,63.5 ccw(c56.642,64.532) R24.2@57.408,63.84 ; 56.642,63.5 cw(c56.642,62.468) R24.2@57.408,63.16 ; 56.642,63.5 ccw(c56.642,64.532) R24.2@57.408,63.84
C: R89.1 U5.15 | length 80.7
  Top Layer w0.254: U5.15@60.722,72.701 60.722,78.375 61.239,78.892 81.763,78.892 81.991,79.121 81.991,86.593 83.917,88.519 90.424,88.519 90.703,88.798 90.703,99.291 92.354,100.942 92.354,106.276 93.368,107.29 94.996,107.29 95.58,107.874 95.58,112.192 95.25,112.522 R89.1@93.472,112.522 ; R89.1@93.958,112.163 cw(c94.825,111.296) 94.825,112.522 ; R89.1@93.958,112.163 cw(c94.825,111.296) 94.825,112.522 ; R89.1@93.958,112.163 cw(c94.825,111.296) 94.825,112.522 ; R89.1@93.958,112.163 cw(c94.825,111.296) 94.825,112.522 ; R89.1@93.958,112.881 ccw(c94.825,113.748) 94.825,112.522 ; R89.1@93.958,112.881 ccw(c94.825,113.748) 94.825,112.522 ; R89.1@93.958,112.881 ccw(c94.825,113.748) 94.825,112.522 ; R89.1@93.958,112.881 ccw(c94.825,113.748) 94.825,112.522
CHECK1: R108.1 U16.19 U17.3 | length 46
  Top Layer w0.762: U17.3@102.616,83.82 104.648,83.82 105.537,84.709 105.537,87.122 106.045,87.63 v1(106.68,87.63) ; U16.19@113.23,100.965 v1(115.824,100.965) ; v1(106.68,87.63) ccw(c106.68,86.097) 105.596,87.181 cw(c106.68,86.097) v1(106.68,87.63)
  Bottom Layer w0.762: R108.1@109.347,87.503 106.807,87.503 106.807,87.122 ; v1(115.824,100.965) 115.824,87.249 114.3,85.725 108.204,85.725 106.807,87.122 ; v1(106.68,87.63) ccw(c107.167,87.482) 106.807,87.122 ; v1(106.68,87.63) ccw(c107.6,87.63) 106.949,86.98 cw(c107.6,87.63) v1(106.68,87.63) ; v1(106.68,87.63) ccw(c107.167,87.482) 106.807,87.122 ; v1(106.68,87.63) ccw(c107.167,87.482) 106.807,87.122 ; v1(106.68,87.63) ccw(c107.167,87.482) 106.807,87.122 ; v1(106.68,87.63) 106.68,87.249 106.807,87.122 ; 108.427,87.503 cw(c108.427,86.583) 109.078,87.234 ccw(c108.427,86.583) 108.427,87.503 ; 108.427,87.503 ccw(c108.427,88.423) 109.078,87.772 cw(c108.427,88.423) 108.427,87.503
CHECK2: R107.1 U16.2 U17.5 | length 47
  Top Layer w0.508: v1(102.235,95.885) 102.362,95.758 v1(102.362,87.884) ; v1(106.172,82.55) U17.5@108.204,82.55 ; v1@102.145,95.795 cw(c101.622,95.272) 102.362,95.272 ; v1@102.145,95.795 cw(c101.622,95.272) 102.362,95.272 ; v1@102.145,95.795 cw(c101.622,95.272) 102.362,95.272 ; v1@102.145,95.795 cw(c101.622,95.272) 102.362,95.272
  Top Layer w0.762: R107.1@94.615,101.346 94.996,100.965 v1(96.52,100.965) ; v1(98.552,100.965) U16.2@100.13,100.965 ; R107.1@94.869,101.062 cw(c95.341,100.533) 95.696,101.147 ; R107.1@94.869,101.062 cw(c95.341,100.533) 95.696,101.147 ; R107.1@94.869,101.062 cw(c95.341,100.533) 95.696,101.147 ; R107.1@94.869,101.062 cw(c95.341,100.533) 95.696,101.147 ; R107.1@94.869,101.062 cw(c95.341,100.533) 95.696,101.147 ; R107.1@94.869,101.062 cw(c95.341,100.533) 95.696,101.147 ; R107.1@94.884,101.615 ccw(c96.455,103.186) v1@96.455,100.965 ; R107.1@94.884,101.615 ccw(c96.455,103.186) v1@96.455,100.965 ; R107.1@94.884,101.615 ccw(c96.455,103.186) v1@96.455,100.965 ; R107.1@94.884,101.615 ccw(c96.455,103.186) v1@96.455,100.965
  Bottom Layer w0.508: v1(98.552,100.965) 101.727,100.965 102.235,100.457 v1(102.235,95.885) ; v1(102.362,87.884) 104.521,87.884 106.172,86.233 v1(106.172,82.55)
  Bottom Layer w0.762: v1(96.52,100.965) v1(98.552,100.965)
CLK_IN: U1.3 U5.12 | length 26.6
  Top Layer w0.254: v1@61.468,77.089 62.222,76.335 U5.12@62.222,72.701 ; v1@61.7,76.985 cw(c61.77,76.834) 61.881,76.957 cw(c61.993,77.08) v1@61.835,77.134 ; v1(61.595,77.216) cw(c61.255,76.552) 61.975,76.745 ; v1(61.595,77.216) ccw(c62.208,77.216) 61.775,76.782 ; v1(61.595,77.216) cw(c61.255,76.552) 61.975,76.745 ; v1(61.595,77.216) ccw(c62.208,77.216) 61.775,76.782 ; v1(61.595,77.216) cw(c61.255,76.552) 61.975,76.745 ; v1(61.595,77.216) ccw(c62.208,77.216) 61.775,76.782 ; v1@61.849,77.216 ccw(c63.075,77.216) 62.208,76.349 ; v1@61.849,77.216 ccw(c63.075,77.216) 62.208,76.349 ; v1@61.849,77.216 ccw(c63.075,77.216) 62.208,76.349
  Top Layer w0.762: U1.3@61.861,83.06 61.861,84.316 v1(61.595,84.582) ; v1(61.595,84.582) cw(c60.952,83.939) 61.861,83.939 ; v1(61.595,84.582) cw(c60.952,83.939) 61.861,83.939 ; v1(61.595,84.582) cw(c60.952,83.939) 61.861,83.939 ; U1.3@61.6,83.321 ccw(c60.97,83.951) 61.861,83.951 ; U1.3@61.6,83.321 ccw(c60.97,83.951) 61.861,83.951 ; U1.3@61.6,83.321 ccw(c60.97,83.951) 61.861,83.951 ; 61.861,83.951 ccw(c62.752,83.951) U1.3@62.122,83.321 ; 61.861,83.951 ccw(c62.752,83.951) U1.3@62.122,83.321 ; 61.861,83.951 ccw(c62.752,83.951) U1.3@62.122,83.321
  Bottom Layer w0.762: v1(61.595,77.216) v1(61.595,84.582)
D: R88.1 U5.17 | length 77.8
  Top Layer w0.254: U5.17@59.722,72.701 59.722,79.153 60.325,79.756 73.279,79.756 73.66,80.137 v1(73.66,82.931) ; R88.1@74.93,107.569 74.93,100.584 v1(74.295,99.949) ; v1@73.48,82.751 cw(c73.047,82.318) 73.66,82.318 ; v1@73.48,82.751 cw(c73.047,82.318) 73.66,82.318 ; v1@73.48,82.751 cw(c73.047,82.318) 73.66,82.318 ; v1@73.48,82.751 cw(c73.047,82.318) 73.66,82.318 ; 73.66,82.318 cw(c74.273,82.318) v1@73.84,82.751 ; 73.66,82.318 cw(c74.273,82.318) v1@73.84,82.751 ; 73.66,82.318 cw(c74.273,82.318) v1@73.84,82.751 ; 73.66,82.318 cw(c74.273,82.318) v1@73.84,82.751 ; v1(74.295,99.949) cw(c74.73,99.86) 74.615,100.289 ; v1(74.295,99.949) cw(c74.73,99.86) 74.615,100.289 ; v1(74.295,99.949) cw(c74.73,99.86) 74.615,100.289 ; v1(74.295,99.949) ccw(c74.206,100.384) 74.635,100.269 ; v1(74.295,99.949) ccw(c74.206,100.384) 74.635,100.269 ; v1(74.295,99.949) ccw(c74.206,100.384) 74.635,100.269 ; v1(74.295,99.949) cw(c74.73,99.86) 74.615,100.289 ; v1(74.295,99.949) cw(c74.73,99.86) 74.615,100.289 ; v1(74.295,99.949) ccw(c74.206,100.384) 74.635,100.269 ; v1(74.295,99.949) ccw(c74.206,100.384) 74.635,100.269 ; v1(74.295,99.949) cw(c74.73,99.86) 74.615,100.289 ; v1(74.295,99.949) ccw(c74.206,100.384) 74.635,100.269 ; v1@74.295,100.203 ccw(c74.295,100.816) 74.729,100.383 ; v1@74.295,100.203 ccw(c74.295,100.816) 74.729,100.383 ; v1@74.295,100.203 ccw(c74.295,100.816) 74.729,100.383 ; v1@74.295,100.203 ccw(c74.295,100.816) 74.729,100.383 ; v1@74.549,99.949 cw(c75.162,99.949) 74.729,100.383 ; v1@74.549,99.949 cw(c75.162,99.949) 74.729,100.383 ; v1@74.549,99.949 cw(c75.162,99.949) 74.729,100.383 ; v1@74.549,99.949 cw(c75.162,99.949) 74.729,100.383 ; R88.1@74.571,107.21 cw(c73.704,106.343) 74.93,106.343 ; R88.1@74.571,107.21 cw(c73.704,106.343) 74.93,106.343 ; R88.1@74.571,107.21 cw(c73.704,106.343) 74.93,106.343 ; R88.1@74.571,107.21 cw(c73.704,106.343) 74.93,106.343 ; 74.93,106.343 cw(c76.156,106.343) R88.1@75.289,107.21 ; 74.93,106.343 cw(c76.156,106.343) R88.1@75.289,107.21 ; 74.93,106.343 cw(c76.156,106.343) R88.1@75.289,107.21 ; 74.93,106.343 cw(c76.156,106.343) R88.1@75.289,107.21
  Bottom Layer w0.254: v1(73.66,82.931) 73.66,99.314 v1(74.295,99.949) ; v1@73.48,83.111 ccw(c73.047,83.544) 73.66,83.544 ; v1@73.48,83.111 ccw(c73.047,83.544) 73.66,83.544 ; v1@73.48,83.111 ccw(c73.047,83.544) 73.66,83.544 ; v1@73.48,83.111 ccw(c73.047,83.544) 73.66,83.544 ; 73.66,83.544 ccw(c74.273,83.544) v1@73.84,83.111 ; 73.66,83.544 ccw(c74.273,83.544) v1@73.84,83.111 ; 73.66,83.544 ccw(c74.273,83.544) v1@73.84,83.111 ; 73.66,83.544 ccw(c74.273,83.544) v1@73.84,83.111 ; 73.861,99.515 cw(c74.295,99.082) v1@74.295,99.695 ; 73.861,99.515 ccw(c73.428,99.949) v1@74.041,99.949 ; 73.861,99.515 cw(c74.295,99.082) v1@74.295,99.695 ; 73.861,99.515 ccw(c73.428,99.949) v1@74.041,99.949 ; 73.861,99.515 cw(c74.295,99.082) v1@74.295,99.695 ; 73.861,99.515 ccw(c73.428,99.949) v1@74.041,99.949 ; 73.861,99.515 cw(c74.295,99.082) v1@74.295,99.695 ; 73.861,99.515 ccw(c73.428,99.949) v1@74.041,99.949
DP: R9.1 U5.16 | length 70.8
  Top Layer w0.254: U5.16@60.222,72.701 60.222,79.018 60.528,79.324 81.356,79.324 81.559,79.527 81.559,86.772 83.739,88.951 89.687,88.951 90.272,89.535 90.272,99.47 91.059,100.257 R9.1@91.059,107.315 ; R9.1@90.7,106.829 cw(c89.833,105.962) 91.059,105.962 ; R9.1@90.7,106.829 cw(c89.833,105.962) 91.059,105.962 ; R9.1@90.7,106.829 cw(c89.833,105.962) 91.059,105.962 ; R9.1@90.7,106.829 cw(c89.833,105.962) 91.059,105.962 ; 91.059,105.962 cw(c92.285,105.962) R9.1@91.418,106.829 ; 91.059,105.962 cw(c92.285,105.962) R9.1@91.418,106.829 ; 91.059,105.962 cw(c92.285,105.962) R9.1@91.418,106.829 ; 91.059,105.962 cw(c92.285,105.962) R9.1@91.418,106.829
E: R87.1 U5.18 | length 103.2
  Top Layer w0.254: U5.18@59.222,72.701 59.222,79.72 59.69,80.188 70.739,80.188 ; v1@71.12,99.568 73.025,101.473 73.025,109.601 73.533,110.109 R87.1@74.93,110.109 ; 70.739,80.188 ccw(c70.259,80.667) v1@70.886,80.928 ; 70.739,80.188 ccw(c70.259,80.667) v1@70.886,80.928 ; 70.739,80.188 ccw(c70.259,80.667) v1@70.886,80.928 ; 70.739,80.188 ccw(c70.259,80.667) v1@70.886,80.928 ; 70.739,80.188 71.12,80.569 ; v1@70.986,80.81 cw(c70.836,80.569) 71.12,80.569 ; v1@70.986,80.81 cw(c70.836,80.569) 71.12,80.569 ; v1@70.986,80.81 cw(c70.836,80.569) 71.12,80.569 ; v1@70.986,80.81 cw(c70.836,80.569) 71.12,80.569 ; 71.007,80.456 ccw(c70.638,80.825) v1(71.12,81.026) ; 71.007,80.456 ccw(c70.638,80.825) v1(71.12,81.026) ; 71.007,80.456 ccw(c70.638,80.825) v1(71.12,81.026) ; 71.007,80.456 ccw(c70.638,80.825) v1(71.12,81.026) ; 71.12,80.569 cw(c71.404,80.569) v1@71.254,80.81 ; 71.12,80.569 cw(c71.404,80.569) v1@71.254,80.81 ; 71.12,80.569 cw(c71.404,80.569) v1@71.254,80.81 ; 71.12,80.569 cw(c71.404,80.569) v1@71.254,80.81 ; 71.12,80.569 v1(71.12,81.026) ; v1(71.31,99.758) cw(c71.745,99.669) 71.631,100.098 ; v1(71.31,99.758) ccw(c71.221,100.193) 71.65,100.079 ; v1(71.31,99.758) cw(c71.745,99.669) 71.631,100.098 ; v1(71.31,99.758) ccw(c71.221,100.193) 71.65,100.079 ; v1(71.31,99.758) cw(c71.745,99.669) 71.631,100.098 ; v1(71.31,99.758) ccw(c71.221,100.193) 71.65,100.079 ; v1(71.31,99.758) cw(c71.745,99.669) 71.631,100.098 ; v1(71.31,99.758) ccw(c71.221,100.193) 71.65,100.079 ; v1(71.31,99.758) cw(c71.745,99.669) 71.631,100.098 ; v1(71.31,99.758) ccw(c71.221,100.193) 71.65,100.079 ; v1(71.31,99.758) cw(c71.745,99.669) 71.631,100.098 ; v1(71.31,99.758) ccw(c71.221,100.193) 71.65,100.079 ; v1@71.31,100.013 ccw(c71.31,100.626) 71.744,100.192 ; v1@71.31,100.013 ccw(c71.31,100.626) 71.744,100.192 ; v1@71.31,100.013 ccw(c71.31,100.626) 71.744,100.192 ; v1@71.31,100.013 ccw(c71.31,100.626) 71.744,100.192 ; v1@71.564,99.758 cw(c72.178,99.758) 71.744,100.192 ; v1@71.564,99.758 cw(c72.178,99.758) 71.744,100.192 ; v1@71.564,99.758 cw(c72.178,99.758) 71.744,100.192 ; v1@71.564,99.758 cw(c72.178,99.758) 71.744,100.192 ; 73.577,110.109 cw(c73.577,108.883) R87.1@74.444,109.75 ; 73.577,110.109 ccw(c73.577,111.335) R87.1@74.444,110.468 ; 73.577,110.109 cw(c73.577,108.883) R87.1@74.444,109.75 ; 73.577,110.109 ccw(c73.577,111.335) R87.1@74.444,110.468 ; 73.577,110.109 cw(c73.577,108.883) R87.1@74.444,109.75 ; 73.577,110.109 ccw(c73.577,111.335) R87.1@74.444,110.468 ; 73.577,110.109 cw(c73.577,108.883) R87.1@74.444,109.75 ; 73.577,110.109 ccw(c73.577,111.335) R87.1@74.444,110.468
  Bottom Layer w0.254: v1@71.501,99.949 71.12,99.568 71.12,92.71 71.374,92.456 71.374,81.28 v1(71.12,81.026) ; v1@70.94,81.206 ccw(c69.894,82.252) 71.374,82.252 ; v1@70.94,81.206 ccw(c69.894,82.252) 71.374,82.252 ; v1@70.94,81.206 ccw(c69.894,82.252) 71.374,82.252 ; v1@70.94,81.206 ccw(c69.894,82.252) 71.374,82.252 ; 71.077,81.442 ccw(c71.386,81.264) v1(71.12,81.026) ; 71.077,81.442 ccw(c71.386,81.264) v1(71.12,81.026) ; 71.077,81.442 ccw(c71.386,81.264) v1(71.12,81.026) ; 71.077,81.442 ccw(c71.386,81.264) v1(71.12,81.026) ; 71.077,81.442 ccw(c71.386,81.264) v1(71.12,81.026) ; 71.077,81.442 ccw(c71.386,81.264) v1(71.12,81.026) ; v1@71.116,81.28 ccw(c71.111,81.55) 71.344,81.415 ; v1@71.116,81.28 ccw(c71.111,81.55) 71.344,81.415 ; v1@71.116,81.28 ccw(c71.111,81.55) 71.344,81.415 ; v1@71.116,81.28 ccw(c71.111,81.55) 71.344,81.415 ; v1@71.116,81.28 ccw(c71.111,81.55) 71.344,81.415 ; v1@71.116,81.28 ccw(c71.111,81.55) 71.344,81.415 ; v1(71.12,81.026) ccw(c70.507,81.639) 71.374,81.639 ; v1(71.12,81.026) ccw(c70.507,81.639) 71.374,81.639 ; v1(71.12,81.026) ccw(c70.507,81.639) 71.374,81.639 ; v1(71.12,81.026) ccw(c70.507,81.639) 71.374,81.639 ; 71.12,98.685 cw(c72.384,98.685) v1@71.49,99.579 ; 71.12,98.685 cw(c72.384,98.685) v1@71.49,99.579 ; 71.12,98.685 cw(c72.384,98.685) v1@71.49,99.579 ; 71.12,98.685 cw(c72.384,98.685) v1@71.49,99.579 ; 71.12,99.299 cw(c71.77,99.299) v1(71.31,99.758) ; 71.12,99.299 cw(c71.77,99.299) v1(71.31,99.758) ; 71.12,99.299 cw(c71.77,99.299) v1(71.31,99.758) ; 71.12,99.299 cw(c71.77,99.299) v1(71.31,99.758) ; v1@71.153,99.559 cw(c70.948,99.3) 71.234,99.135 ; v1@71.153,99.559 cw(c70.948,99.3) 71.234,99.135 ; v1@71.153,99.559 cw(c70.948,99.3) 71.234,99.135 ; v1@71.153,99.559 cw(c70.948,99.3) 71.234,99.135 ; v1@71.153,99.559 cw(c70.948,99.3) 71.234,99.135 ; v1@71.153,99.559 cw(c70.948,99.3) 71.234,99.135 ; 71.253,81.747 ccw(c71.662,81.51) v1@71.309,81.195 ; 71.253,81.747 ccw(c71.662,81.51) v1@71.309,81.195 ; 71.253,81.747 ccw(c71.662,81.51) v1@71.309,81.195 ; 71.253,81.747 ccw(c71.662,81.51) v1@71.309,81.195 ; 71.253,81.747 ccw(c71.662,81.51) v1@71.309,81.195 ; 71.253,81.747 ccw(c71.662,81.51) v1@71.309,81.195 ; v1@71.342,81.149 cw(c71.578,81.28) 71.344,81.415 ; v1@71.342,81.149 cw(c71.578,81.28) 71.344,81.415 ; v1@71.342,81.149 cw(c71.578,81.28) 71.344,81.415 ; v1@71.342,81.149 cw(c71.578,81.28) 71.344,81.415 ; v1@71.342,81.149 cw(c71.578,81.28) 71.344,81.415 ; v1@71.342,81.149 cw(c71.578,81.28) 71.344,81.415
F: R84.1 U5.24 | length 80.2
  Top Layer w0.254: U5.24@56.222,72.701 56.222,79.844 57.429,81.051 65.659,81.051 ; v1(66.04,81.432) 65.659,81.051 ; v3(66.04,99.568) 66.04,100.33 ; R84.1@74.93,114.935 73.787,114.935 ; 65.659,81.051 cw(c65.973,80.737) v1@66.016,81.18 ; 65.659,81.051 ccw(c65.345,81.366) v1@65.787,81.408 ; 65.659,81.051 cw(c65.973,80.737) v1@66.016,81.18 ; 65.659,81.051 ccw(c65.345,81.366) v1@65.787,81.408 ; 65.659,81.051 cw(c65.973,80.737) v1@66.016,81.18 ; 65.659,81.051 ccw(c65.345,81.366) v1@65.787,81.408 ; 65.659,81.051 cw(c65.973,80.737) v1@66.016,81.18 ; 65.659,81.051 ccw(c65.345,81.366) v1@65.787,81.408 ; v3@65.816,99.793 ccw(c65.284,100.33) 66.04,100.33 ; v3@65.816,99.793 ccw(c65.284,100.33) 66.04,100.33 ; v3@65.816,99.793 ccw(c65.284,100.33) 66.04,100.33 ; v3@65.816,99.793 ccw(c65.284,100.33) 66.04,100.33 ; 66.04,100.33 ccw(c66.796,100.33) v3@66.264,99.793 ; 66.04,100.33 ccw(c66.796,100.33) v3@66.264,99.793 ; 66.04,100.33 ccw(c66.796,100.33) v3@66.264,99.793 ; 66.04,100.33 ccw(c66.796,100.33) v3@66.264,99.793 ; 66.04,100.33 66.675,100.965 70.89,100.965 72.136,102.211 72.136,111.609 73.152,112.625 73.152,114.3 73.787,114.935 ; 73.787,114.935 cw(c73.787,114.173) R84.1@74.397,114.63 ; 73.787,114.935 ccw(c73.787,115.697) R84.1@74.397,115.24 ; 73.787,114.935 cw(c73.787,114.173) R84.1@74.397,114.63 ; 73.787,114.935 ccw(c73.787,115.697) R84.1@74.397,115.24 ; 73.787,114.935 cw(c73.787,114.173) R84.1@74.397,114.63 ; 73.787,114.935 ccw(c73.787,115.697) R84.1@74.397,115.24 ; 73.787,114.935 cw(c73.787,114.173) R84.1@74.397,114.63 ; 73.787,114.935 ccw(c73.787,115.697) R84.1@74.397,115.24
  Bottom Layer w0.254: v1(66.04,81.432) v3(66.04,99.568) ; v3@65.815,99.343 cw(c65.273,98.801) 66.04,98.801 ; v3@65.815,99.343 cw(c65.273,98.801) 66.04,98.801 ; v3@65.815,99.343 cw(c65.273,98.801) 66.04,98.801 ; v3@65.815,99.343 cw(c65.273,98.801) 66.04,98.801 ; v1@65.86,81.612 ccw(c65.427,82.046) 66.04,82.046 ; v1@65.86,81.612 ccw(c65.427,82.046) 66.04,82.046 ; v1@65.86,81.612 ccw(c65.427,82.046) 66.04,82.046 ; v1@65.86,81.612 ccw(c65.427,82.046) 66.04,82.046 ; 66.04,82.046 ccw(c66.653,82.046) v1@66.22,81.612 ; 66.04,82.046 ccw(c66.653,82.046) v1@66.22,81.612 ; 66.04,82.046 ccw(c66.653,82.046) v1@66.22,81.612 ; 66.04,82.046 ccw(c66.653,82.046) v1@66.22,81.612 ; 66.04,98.801 cw(c66.807,98.801) v3@66.265,99.343 ; 66.04,98.801 cw(c66.807,98.801) v3@66.265,99.343 ; 66.04,98.801 cw(c66.807,98.801) v3@66.265,99.343 ; 66.04,98.801 cw(c66.807,98.801) v3@66.265,99.343
FLASH_CS: U5.29 U7.1 | length 13.8
  Top Layer w0.254: U7.1@43.053,72.898 44.577,72.898 46.482,70.993 51.363,70.993 52.705,69.651 U5.29@54.172,69.651 ; 44.193,72.898 cw(c44.193,73.327) 43.89,73.024 ccw(c44.193,73.327) 44.193,72.898 ; 44.193,72.898 ccw(c44.193,72.469) 43.89,72.772 cw(c44.193,72.469) 44.193,72.898